# EAGLE board registers (EAGLE 9.5.2)
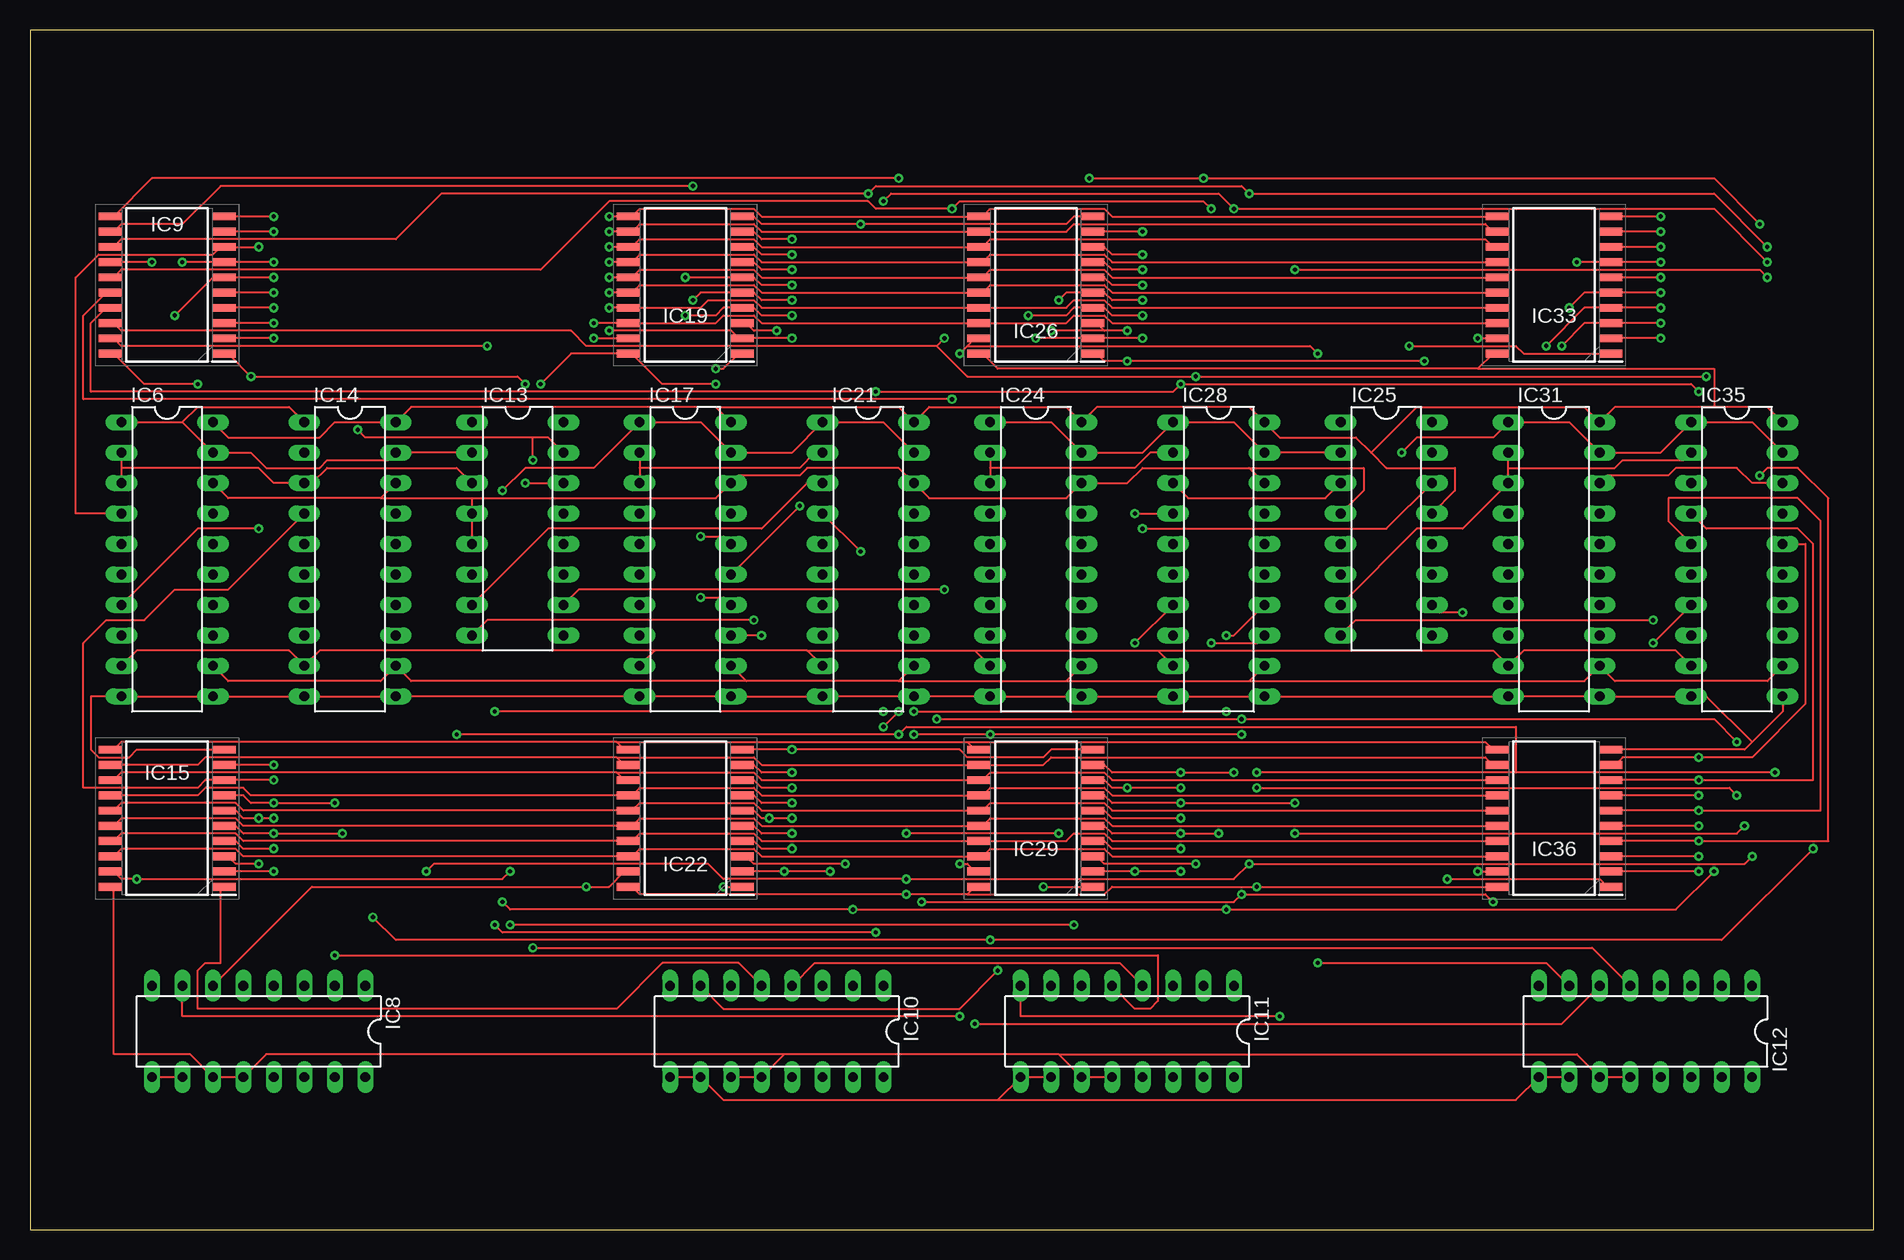
[diagram p0: board, top side]
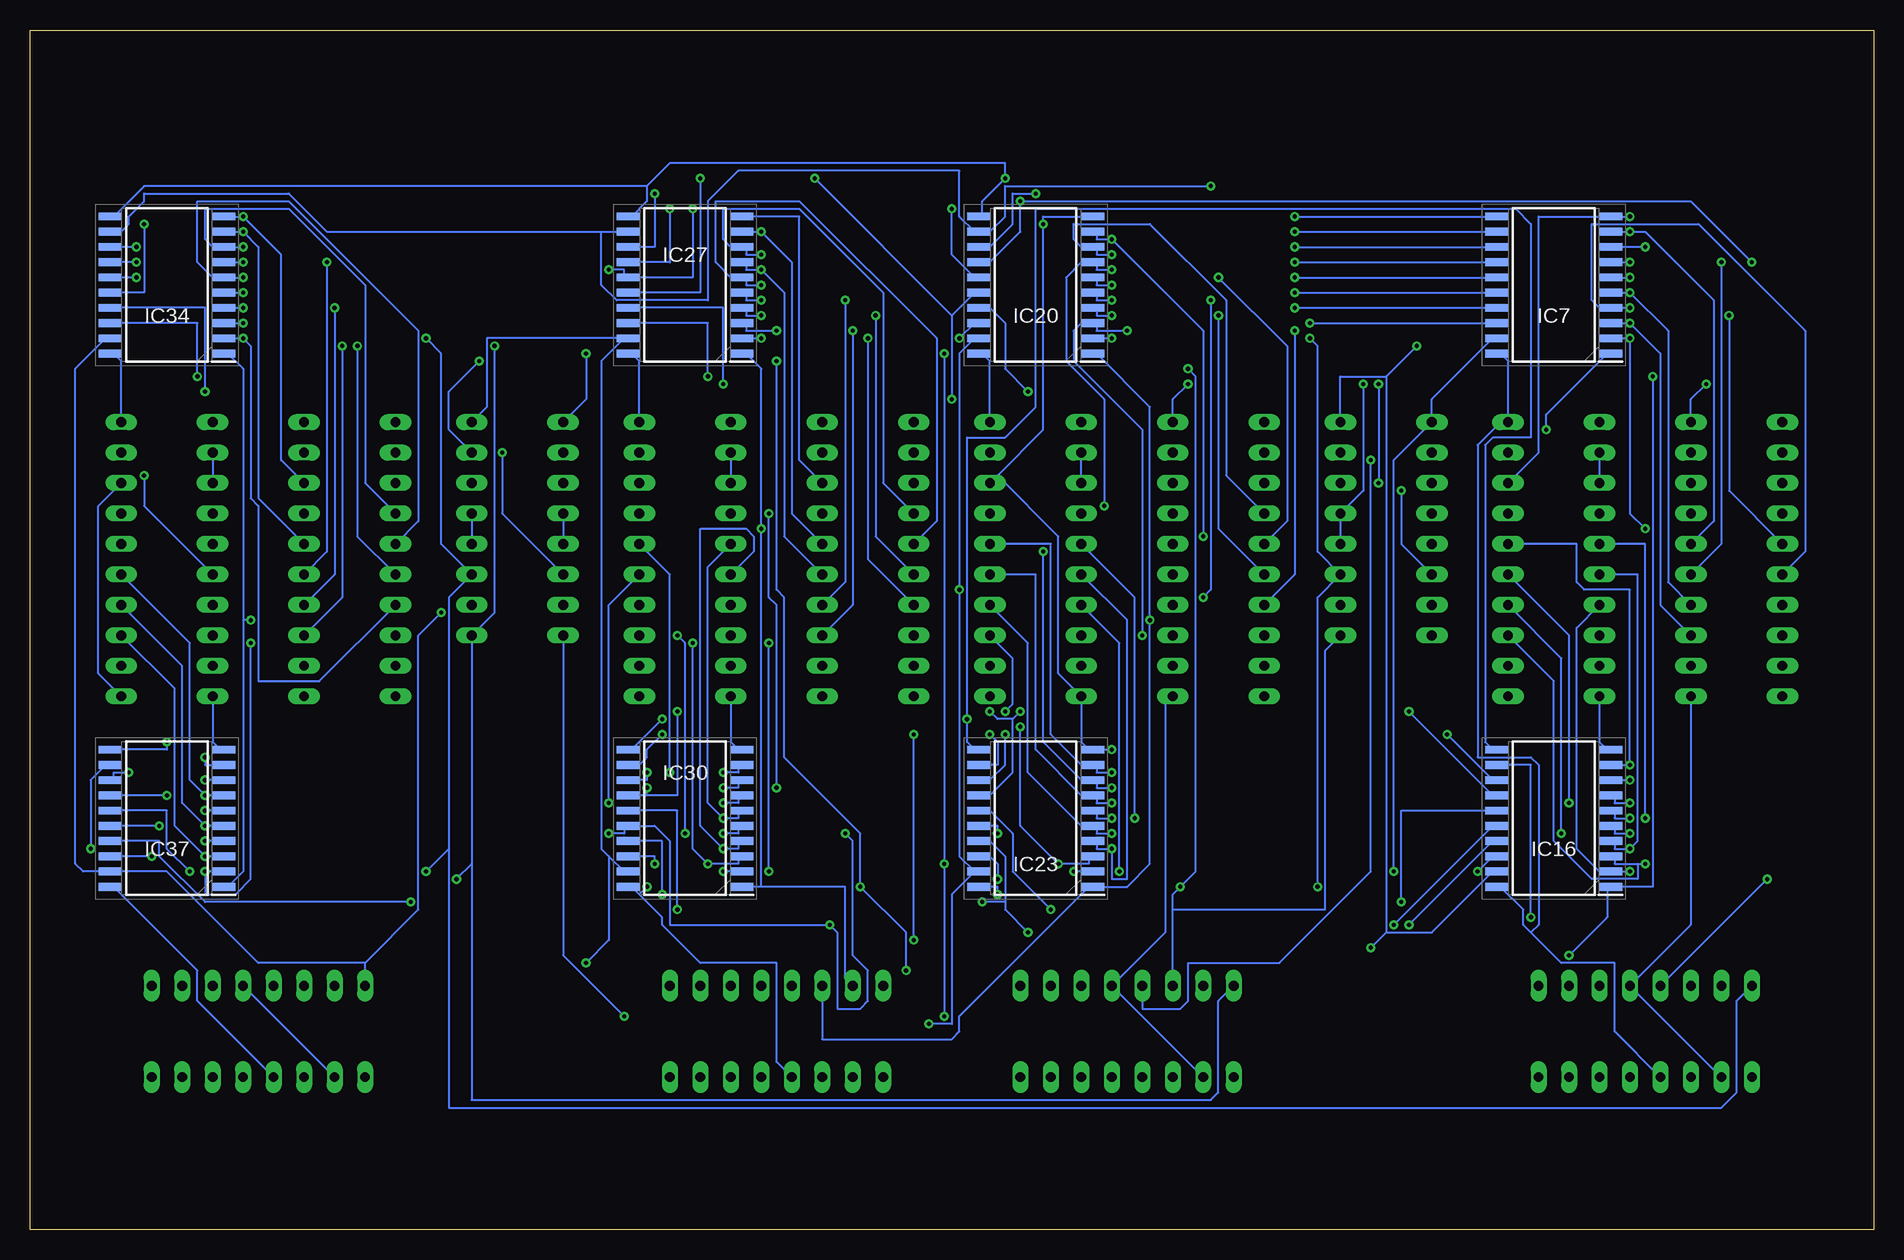
[diagram p1: board, bottom side, seen from below]

Size 153.65 x 100 mm. Coordinates in mm from the lower left corner, seen from the top.
Outline: 0,0 153.65,0 153.65,100 0,100 0,0
Copper layers (1*16): Top 0.035mm / dielectric 1.5mm / Bottom 0.035mm
Design rules "default *": minimum track width 6mil, minimum drill 0.35mm, track to track 6mil, track to pad 6mil, pad to pad 6mil, via to via 6mil, smd to smd 6mil, copper to edge 40mil, drill to drill 6mil, minimum pad ring 10mil, minimum via ring 8mil, stop-mask expansion 4mil, vias tented up to drill 0mil, thermal gap 10mil

## Footprints (pad centres in the part's own frame; a part is rotated, then mirrored left to right if it is on the bottom)
DIL20 = drill 0.813 long: 1 -11.43,-3.81; 2 -8.89,-3.81; 3 -6.35,-3.81; 4 -3.81,-3.81; 5 -1.27,-3.81; 6 1.27,-3.81; 7 3.81,-3.81; 8 6.35,-3.81; 9 8.89,-3.81; 10 11.43,-3.81; 11 11.43,3.81; 12 8.89,3.81; 13 6.35,3.81; 14 3.81,3.81; 15 1.27,3.81; 16 -1.27,3.81; 17 -3.81,3.81; 18 -6.35,3.81; 19 -8.89,3.81; 20 -11.43,3.81
SOIC127P1030X265-20N = smd 1.95 x 0.65: 1 -4.725,5.715; 2 -4.725,4.445; 3 -4.725,3.175; 4 -4.725,1.905; 5 -4.725,0.635; 6 -4.725,-0.635; 7 -4.725,-1.905; 8 -4.725,-3.175; 9 -4.725,-4.445; 10 -4.725,-5.715; 11 4.725,-5.715; 12 4.725,-4.445; 13 4.725,-3.175; 14 4.725,-1.905; 15 4.725,-0.635; 16 4.725,0.635; 17 4.725,1.905; 18 4.725,3.175; 19 4.725,4.445; 20 4.725,5.715
DIL16 = drill 0.813 long: 1 -8.89,-3.81; 2 -6.35,-3.81; 3 -3.81,-3.81; 4 -1.27,-3.81; 5 1.27,-3.81; 6 3.81,-3.81; 7 6.35,-3.81; 8 8.89,-3.81; 9 8.89,3.81; 10 6.35,3.81; 11 3.81,3.81; 12 1.27,3.81; 13 -1.27,3.81; 14 -3.81,3.81; 15 -6.35,3.81; 16 -8.89,3.81

## Placement (x,y rotation side)
IC6  74HCT299N  [DIL20]  11.43,55.88 270 top
IC7  SN74CBT3345DW  [SOIC127P1030X265-20N]  26.67,78.74 180 bottom
IC8  74AC11138  [DIL16]  19.05,16.51 180 top
IC9  SN74CBT3345DW  [SOIC127P1030X265-20N]  11.43,78.74 180 top
IC10  74AC11238  [DIL16]  62.23,16.51 180 top
IC11  74AC11238  [DIL16]  91.44,16.51 180 top
IC12  74AC11138  [DIL16]  134.62,16.51 180 top
IC13  74AC11032  [DIL16]  40.64,58.42 270 top
IC14  74HCT299N  [DIL20]  26.67,55.88 270 top
IC15  SN74CBT3345DW  [SOIC127P1030X265-20N]  11.43,34.29 180 top
IC16  SN74CBT3345DW  [SOIC127P1030X265-20N]  26.67,34.29 180 bottom
IC17  74HCT299N  [DIL20]  54.61,55.88 270 top
IC19  SN74CBT3345DW  [SOIC127P1030X265-20N]  54.61,78.74 180 top
IC20  SN74CBT3345DW  [SOIC127P1030X265-20N]  69.85,78.74 180 bottom
IC21  74HCT299N  [DIL20]  69.85,55.88 270 top
IC22  SN74CBT3345DW  [SOIC127P1030X265-20N]  54.61,34.29 180 top
IC23  SN74CBT3345DW  [SOIC127P1030X265-20N]  69.85,34.29 180 bottom
IC24  74HCT299N  [DIL20]  83.82,55.88 270 top
IC25  74AC11032  [DIL16]  113.03,58.42 270 top
IC26  SN74CBT3345DW  [SOIC127P1030X265-20N]  83.82,78.74 180 top
IC27  SN74CBT3345DW  [SOIC127P1030X265-20N]  99.06,78.74 180 bottom
IC28  74HCT299N  [DIL20]  99.06,55.88 270 top
IC29  SN74CBT3345DW  [SOIC127P1030X265-20N]  83.82,34.29 180 top
IC30  SN74CBT3345DW  [SOIC127P1030X265-20N]  99.06,34.29 180 bottom
IC31  74HCT299N  [DIL20]  127,55.88 270 top
IC33  SN74CBT3345DW  [SOIC127P1030X265-20N]  127,78.74 180 top
IC34  SN74CBT3345DW  [SOIC127P1030X265-20N]  142.24,78.74 180 bottom
IC35  74HCT299N  [DIL20]  142.24,55.88 270 top
IC36  SN74CBT3345DW  [SOIC127P1030X265-20N]  127,34.29 180 top
IC37  SN74CBT3345DW  [SOIC127P1030X265-20N]  142.24,34.29 180 bottom

## Library data of the parts
IC6 IC14 IC17 IC21 IC24 IC28 IC31 IC35 = 74xx-eu
IC7 IC9 IC15 IC16 IC19 IC20 IC22 IC23 IC26 IC27 IC29 IC30 IC33 IC34 IC36 IC37 = SamacSys_Parts; DESCRIPTION: Texas Instruments SN74CBT3345DW, Bus Switch, 8 x 1:1, 4.5 5.5 V, 20-Pin SOIC; HEIGHT: 2.65mm; MANUFACTURER_NAME: Texas Instruments; MANUFACTURER_PART_NUMBER: SN74CBT3345DW
IC8 IC10-IC13 IC25 = 74ac-logic

## Nets
BUSA_BIT0: IC7.18 IC19.18 IC26.18 IC33.18
BUSA_BIT1: IC7.17 IC19.17 IC26.17 IC33.17
BUSA_BIT2: IC7.16 IC19.16 IC26.16 IC33.16
BUSA_BIT3: IC7.15 IC19.15 IC26.15 IC33.15
BUSA_BIT4: IC7.14 IC19.14 IC26.14 IC33.14
BUSA_BIT5: IC7.13 IC19.13 IC26.13 IC33.13
BUSA_BIT6: IC7.12 IC19.12 IC26.12 IC33.12
BUSA_BIT7: IC7.11 IC19.11 IC26.11 IC33.11
BUSA_BIT8: IC15.18 IC22.18 IC29.18 IC36.18
BUSA_BIT9: IC15.17 IC22.17 IC29.17 IC36.17
BUSA_BIT10: IC15.16 IC22.16 IC29.16 IC36.16
BUSA_BIT11: IC15.15 IC22.15 IC29.15 IC36.15
BUSA_BIT12: IC15.14 IC22.14 IC29.14 IC36.14
BUSA_BIT13: IC15.13 IC22.13 IC29.13 IC36.13
BUSA_BIT14: IC15.12 IC22.12 IC29.12 IC36.12
BUSA_BIT15: IC15.11 IC22.11 IC29.11 IC36.11
BUSA_REGIN0: IC8.15
BUSA_REGIN1: IC8.14
BUSA_REGIN2: IC8.13
BUSA_REGOUT0: IC10.15
BUSA_REGOUT1: IC10.14
BUSA_REGOUT2: IC10.13
BUSB_BIT0: IC9.18 IC20.18 IC27.18 IC34.18
BUSB_BIT1: IC9.17 IC20.17 IC27.17 IC34.17
BUSB_BIT2: IC9.16 IC20.16 IC27.16 IC34.16
BUSB_BIT3: IC9.15 IC20.15 IC27.15 IC34.15
BUSB_BIT4: IC9.14 IC20.14 IC27.14 IC34.14
BUSB_BIT5: IC9.13 IC20.13 IC27.13 IC34.13
BUSB_BIT6: IC9.12 IC20.12 IC27.12 IC34.12
BUSB_BIT7: IC9.11 IC20.11 IC27.11 IC34.11
BUSB_BIT8: IC16.18 IC23.18 IC30.18 IC37.18
BUSB_BIT9: IC16.17 IC23.17 IC30.17 IC37.17
BUSB_BIT10: IC16.16 IC23.16 IC30.16 IC37.16
BUSB_BIT11: IC16.15 IC23.15 IC30.15 IC37.15
BUSB_BIT12: IC16.14 IC23.14 IC30.14 IC37.14
BUSB_BIT13: IC16.13 IC23.13 IC30.13 IC37.13
BUSB_BIT14: IC16.12 IC23.12 IC30.12 IC37.12
BUSB_BIT15: IC16.11 IC23.11 IC30.11 IC37.11
BUSB_REGIN0: IC12.15
BUSB_REGIN1: IC12.14
BUSB_REGIN2: IC12.13
BUSB_REGOUT0: IC11.15
BUSB_REGOUT1: IC11.14
BUSB_REGOUT2: IC11.13
CLK: IC6.12 IC14.12 IC17.12 IC21.12 IC24.12 IC28.12 IC31.12 IC35.12
GND: IC6.10 IC6.11 IC6.18 IC7.10 IC8.4 IC8.9 IC8.10 IC9.10 IC10.4 IC10.9 IC10.10 IC11.4 IC11.9 IC11.10 IC12.4 IC12.9 IC12.10 IC13.4 IC13.5 IC14.10 IC14.11 IC14.18 IC15.10 IC16.10 IC17.10 IC17.11 IC17.18 IC19.10 IC20.10 IC21.10 IC21.11 IC21.18 IC22.10 IC23.10 IC24.10 IC24.11 IC24.18 IC25.4 IC25.5 IC26.10 IC27.10 IC28.10 IC28.11 IC28.18 IC29.10 IC30.10 IC31.10 IC31.11 IC31.18 IC33.10 IC34.10 IC35.10 IC35.11 IC35.18 IC36.10 IC37.10
N$8: IC6.7 IC7.2 IC9.2
N$10: IC7.19 IC8.5 IC13.1 IC15.19
N$18: IC6.13 IC7.3 IC9.3
N$19: IC6.2 IC6.3 IC13.3 IC14.2 IC14.3
N$20: IC6.6 IC7.4 IC9.4
N$21: IC6.1 IC6.19 IC13.2 IC14.1 IC14.19
N$22: IC14.7 IC15.2 IC16.2
N$23: IC14.13 IC15.3 IC16.3
N$24: IC14.6 IC15.4 IC16.4
N$25: IC8.7 IC25.1 IC26.19 IC29.19
N$26: IC6.14 IC7.5 IC9.5
N$27: IC6.5 IC7.6 IC9.6
N$28: IC14.14 IC15.5 IC16.5
N$29: IC14.5 IC15.6 IC16.6
N$30: IC14.15 IC15.7 IC16.7
N$31: IC14.4 IC15.8 IC16.8
N$32: IC9.1 IC11.5 IC13.14 IC16.1
N$33: IC9.19 IC12.5 IC13.16 IC16.19
N$34: IC7.1 IC10.5 IC13.15 IC15.1
N$35: IC14.16 IC15.9 IC16.9
N$41: IC6.15 IC7.7 IC9.7
N$43: IC6.4 IC7.8 IC9.8
N$44: IC13.6 IC17.1 IC17.19 IC21.1 IC21.19
N$45: IC17.7 IC19.2 IC20.2
N$46: IC17.13 IC19.3 IC20.3
N$47: IC6.16 IC7.9 IC9.9
N$48: IC17.6 IC19.4 IC20.4
N$49: IC17.14 IC19.5 IC20.5
N$50: IC17.5 IC19.6 IC20.6
N$51: IC17.15 IC19.7 IC20.7
N$52: IC17.4 IC19.8 IC20.8
N$53: IC17.16 IC19.9 IC20.9
N$54: IC13.7 IC17.2 IC17.3 IC21.2 IC21.3
N$56: IC21.7 IC22.2 IC23.2
N$57: IC21.13 IC22.3 IC23.3
N$58: IC21.6 IC22.4 IC23.4
N$59: IC21.14 IC22.5 IC23.5
N$60: IC21.5 IC22.6 IC23.6
N$61: IC21.15 IC22.7 IC23.7
N$62: IC21.4 IC22.8 IC23.8
N$63: IC21.16 IC22.9 IC23.9
N$69: IC24.1 IC24.19 IC25.2 IC28.1 IC28.19
N$70: IC24.7 IC26.2 IC27.2
N$71: IC24.13 IC26.3 IC27.3
N$72: IC24.6 IC26.4 IC27.4
N$73: IC24.14 IC26.5 IC27.5
N$74: IC24.5 IC26.6 IC27.6
N$75: IC24.15 IC26.7 IC27.7
N$76: IC24.4 IC26.8 IC27.8
N$77: IC24.16 IC26.9 IC27.9
N$78: IC24.2 IC24.3 IC25.3 IC28.2 IC28.3
N$80: IC28.7 IC29.2 IC30.2
N$81: IC28.13 IC29.3 IC30.3
N$82: IC28.6 IC29.4 IC30.4
N$83: IC28.14 IC29.5 IC30.5
N$84: IC28.5 IC29.6 IC30.6
N$85: IC28.15 IC29.7 IC30.7
N$86: IC28.4 IC29.8 IC30.8
N$87: IC28.16 IC29.9 IC30.9
N$93: IC25.6 IC31.1 IC31.19 IC35.1 IC35.19
N$94: IC31.7 IC33.2 IC34.2
N$95: IC31.13 IC33.3 IC34.3
N$96: IC31.6 IC33.4 IC34.4
N$97: IC31.14 IC33.5 IC34.5
N$98: IC31.5 IC33.6 IC34.6
N$99: IC31.15 IC33.7 IC34.7
N$100: IC31.4 IC33.8 IC34.8
N$101: IC31.16 IC33.9 IC34.9
N$102: IC25.7 IC31.2 IC31.3 IC35.2 IC35.3
N$104: IC35.7 IC36.2 IC37.2
N$105: IC35.13 IC36.3 IC37.3
N$106: IC35.6 IC36.4 IC37.4
N$107: IC35.14 IC36.5 IC37.5
N$108: IC35.5 IC36.6 IC37.6
N$109: IC35.15 IC36.7 IC37.7
N$110: IC35.4 IC36.8 IC37.8
N$111: IC35.16 IC36.9 IC37.9
N$112: IC8.6 IC13.11 IC19.19 IC22.19
N$113: IC10.6 IC13.9 IC19.1 IC22.1
N$114: IC12.6 IC13.10 IC20.19 IC23.19
N$115: IC11.6 IC13.8 IC20.1 IC23.1
N$117: IC10.7 IC25.15 IC26.1 IC29.1
N$118: IC12.7 IC25.16 IC27.19 IC30.19
N$119: IC11.7 IC25.14 IC27.1 IC30.1
N$120: IC11.8 IC25.8 IC34.1 IC37.1
N$121: IC12.8 IC25.10 IC34.19 IC37.19
N$122: IC8.8 IC25.11 IC33.19 IC36.19
N$123: IC10.8 IC25.9 IC33.1 IC36.1
STARTUP: IC6.9 IC14.9 IC17.9 IC21.9 IC24.9 IC28.9 IC31.9 IC35.9
VCC: IC6.20 IC7.20 IC8.11 IC8.12 IC9.20 IC10.11 IC10.12 IC11.11 IC11.12 IC12.11 IC12.12 IC13.12 IC13.13 IC14.20 IC15.20 IC16.20 IC17.20 IC19.20 IC20.20 IC21.20 IC22.20 IC23.20 IC24.20 IC25.12 IC25.13 IC26.20 IC27.20 IC28.20 IC29.20 IC30.20 IC31.20 IC33.20 IC34.20 IC35.20 IC36.20 IC37.20

## Tracks (layer width: path | path; a pad name or v marks a point on that pad's centre or on a via)
BUSA_BIT0  (via drill 0.35)
  Top 0.152: v46.99,75.56 IC19.18 57.15,75.56 57.78,76.2 60.33,76.2 60.96,75.56 IC26.18 86.36,75.56 87,76.2 89.53,76.2 90.17,75.56 IC33.18
  Bottom 0.152: v46.99,75.56 IC7.18
BUSA_BIT1  (via drill 0.35)
  Top 0.152: v48.26,76.83 IC19.17 55.88,76.83 56.52,77.47 60.33,77.47 60.96,76.83 IC26.17 86.36,76.83 87,77.47 89.53,77.47 90.17,76.83 IC33.17
  Bottom 0.152: v48.26,76.83 IC7.17
BUSA_BIT2  (via drill 0.35)
  Top 0.152: v48.26,78.11 IC19.16 50.16,78.11 50.8,78.74 60.33,78.74 60.96,78.11 IC26.16 79.38,78.11 80.01,78.74 89.53,78.74 90.17,78.11 IC33.16
  Bottom 0.152: v48.26,78.11 IC7.16
BUSA_BIT3  (via drill 0.35)
  Top 0.152: v48.26,79.38 IC19.15 50.16,79.38 50.8,80.01 60.33,80.01 60.96,79.38 IC26.15 79.38,79.38 80.01,80.01 89.53,80.01 90.17,79.38 IC33.15
  Bottom 0.152: v48.26,79.38 IC7.15
BUSA_BIT4  (via drill 0.35)
  Top 0.152: v48.26,80.64 IC19.14 50.16,80.64 50.8,81.28 60.33,81.28 60.96,80.64 IC26.14 79.38,80.64 80.01,81.28 89.53,81.28 90.17,80.64 IC33.14
  Bottom 0.152: v48.26,80.64 IC7.14
BUSA_BIT5  (via drill 0.35)
  Top 0.152: v48.26,81.92 IC19.13 50.16,81.92 50.8,82.55 60.33,82.55 60.96,81.92 IC26.13 79.38,81.92 80.01,82.55 121.28,82.55 121.92,81.92 IC33.13
  Bottom 0.152: v48.26,81.92 IC7.13
BUSA_BIT6  (via drill 0.35)
  Top 0.152: v48.26,83.19 IC19.12 50.16,83.19 50.8,83.82 60.33,83.82 60.96,83.19 IC26.12 86.36,83.19 87,83.82 121.28,83.82 121.92,83.19 IC33.12
  Bottom 0.152: v48.26,83.19 IC7.12
BUSA_BIT7  (via drill 0.35)
  Top 0.152: v48.26,84.45 IC19.11 50.16,84.45 50.8,85.09 60.33,85.09 60.96,84.45 IC26.11 79.38,84.45 80.01,85.09 89.53,85.09 90.17,84.45 IC33.11
  Bottom 0.152: v48.26,84.45 IC7.11
BUSA_BIT8
  Top 0.152: IC15.18 6.99,31.11 7.62,31.75 17.14,31.75 17.78,31.11 IC22.18 50.16,31.11 50.8,31.75 60.33,31.75 60.96,31.11 IC29.18 79.38,31.11 80.01,31.75 89.53,31.75 90.17,31.11 IC36.18
BUSA_BIT9
  Top 0.152: IC15.17 6.99,32.38 7.62,33.02 17.14,33.02 17.78,32.38 IC22.17 50.16,32.38 50.8,33.02 60.33,33.02 60.96,32.38 IC29.17 86.36,32.38 87,33.02 89.53,33.02 90.17,32.38 IC36.17
BUSA_BIT10
  Top 0.152: IC15.16 6.99,33.66 7.62,34.29 17.14,34.29 17.78,33.66 IC22.16 50.16,33.66 50.8,34.29 60.33,34.29 60.96,33.66 IC29.16 79.38,33.66 80.01,34.29 89.53,34.29 90.17,33.66 IC36.16
BUSA_BIT11
  Top 0.152: IC15.15 6.99,34.92 7.62,35.56 17.14,35.56 17.78,34.92 IC22.15 50.16,34.92 50.8,35.56 60.33,35.56 60.96,34.92 IC29.15 79.38,34.92 80.01,35.56 89.53,35.56 90.17,34.92 IC36.15
BUSA_BIT12
  Top 0.152: IC15.14 13.97,36.2 14.61,36.83 17.78,36.83 18.41,36.2 IC22.14 50.16,36.2 50.8,36.83 60.33,36.83 60.96,36.2 IC29.14 79.38,36.2 80.01,36.83 89.53,36.83 90.17,36.2 IC36.14
BUSA_BIT13
  Top 0.152: 48.9,38.1 7.62,38.1 6.99,37.47 IC15.13 | 48.9,38.1 49.53,37.47 IC22.13 | 48.9,38.1 60.33,38.1 60.96,37.47 IC29.13 79.38,37.47 80.01,38.1 89.53,38.1 90.17,37.47 IC36.13
BUSA_BIT14
  Top 0.152: IC15.12 13.97,38.73 14.61,39.37 48.9,39.37 | 48.9,39.37 49.53,38.73 IC22.12 | 48.9,39.37 60.33,39.37 60.96,38.73 IC29.12 84.45,38.73 85.09,39.37 121.28,39.37 121.92,38.73 IC36.12
BUSA_BIT15
  Top 0.152: 48.9,40.64 7.62,40.64 6.99,40.01 IC15.11 | 48.9,40.64 49.53,40.01 IC22.11 | 78.11,40.64 78.74,40.01 IC29.11 | 48.9,40.64 78.11,40.64 | 78.11,40.64 121.28,40.64 121.92,40.01 IC36.11
BUSB_BIT0  (via drill 0.35)
  Top 0.152: 75.56,73.66 46.35,73.66 45.09,74.93 7.62,74.93 6.99,75.56 IC9.18 | v76.2,74.3 75.56,73.66 | 75.56,73.66 78.11,71.12 v97.16,71.12 v139.7,71.12
  Bottom 0.152: v76.2,74.3 74.93,75.56 IC20.18 | IC27.18 97.16,75.56 v97.16,71.12 | IC34.18 139.7,75.56 v139.7,71.12
BUSB_BIT1  (via drill 0.35)
  Top 0.152: IC9.17 6.35,76.83 5.08,75.56 5.08,69.85 v70.48,69.85 95.25,69.85 v95.89,70.48 138.43,70.48 v139.06,69.85
  Bottom 0.152: v70.48,69.85 72.39,71.75 72.39,75.56 73.66,76.83 IC20.17 | IC27.17 95.89,76.83 v95.89,70.48 | IC34.17 139.06,76.83 v139.06,69.85
BUSB_BIT2  (via drill 0.35)
  Top 0.152: v76.83,69.22 4.45,69.22 4.45,76.2 6.35,78.11 IC9.16 | v88.27,87.63 v97.79,87.63 140.34,87.63 v144.15,83.82
  Bottom 0.152: 76.83,76.2 v76.83,69.22 | 76.83,76.2 74.93,78.11 IC20.16 | IC27.16 97.79,78.11 v97.79,87.63 | 76.83,76.2 v88.27,87.63 | IC34.16 144.15,78.11 v144.15,83.82
BUSB_BIT3  (via drill 0.35)
  Top 0.152: IC9.15 6.99,79.38 7.62,80.01 42.55,80.01 48.26,85.72 69.85,85.72 70.48,85.09 v76.83,85.09 77.47,85.72 97.79,85.72 v98.42,85.09 | v144.78,79.38 144.15,80.01 v105.41,80.01
  Bottom 0.152: v76.83,85.09 76.83,81.28 74.93,79.38 IC20.15 | v98.42,85.09 98.42,79.38 IC27.15 104.14,79.38 104.14,80.01 v105.41,80.01 | v144.78,79.38 IC34.15
BUSB_BIT4  (via drill 0.35)
  Top 0.152: v10.16,80.64 IC9.14 | v71.12,85.72 71.75,86.36 99.06,86.36 v100.33,85.09 140.34,85.09 v144.78,80.64
  Bottom 0.152: v10.16,80.64 15.24,85.72 v71.12,85.72 71.12,83.19 73.66,80.64 IC20.14 | IC27.14 100.33,80.64 v100.33,85.09 | v144.78,80.64 IC34.14
BUSB_BIT5  (via drill 0.35)
  Top 0.152: IC9.13 6.99,81.92 7.62,82.55 30.48,82.55 34.29,86.36 v69.85,86.36 70.48,87 100.97,87 v101.6,86.36 140.34,86.36 v144.78,81.92
  Bottom 0.152: v69.85,86.36 71.75,86.36 71.75,83.82 73.66,81.92 IC20.13 | IC27.13 101.6,81.92 v101.6,86.36 | v144.78,81.92 IC34.13
BUSB_BIT6  (via drill 0.35)
  Top 0.152: v55.24,87 15.88,87 12.7,83.82 7.62,83.82 6.99,83.19 IC9.12
  Bottom 0.152: 106.05,83.19 128.91,83.19 132.08,86.36 144.15,86.36 144.15,85.72 145.41,84.45 145.41,83.82 146.05,83.19 IC34.12 | 106.05,83.19 IC27.12 | v55.24,87 72.39,87 72.39,84.45 73.66,83.19 IC20.12 74.93,83.19 76.2,84.45 76.2,88.27 94.61,88.27 97.16,85.72 97.16,77.47 104.78,77.47 106.05,78.74 106.05,83.19
BUSB_BIT7  (via drill 0.35)
  Top 0.152: v72.39,87.63 10.16,87.63 6.99,84.45 IC9.11
  Bottom 0.152: IC20.11 74.3,84.45 74.3,85.72 v72.39,87.63 72.39,88.9 100.33,88.9 102.23,87 | 102.23,87 102.23,85.72 103.5,84.45 IC27.11 | 102.23,87 144.15,87 146.69,84.45 IC34.11
BUSB_BIT8  (via drill 0.35)
  Top 0.152: v33.02,29.84 33.66,30.48 56.52,30.48 57.78,29.21 v73.03,29.21 100.33,29.21 v101.6,30.48 142.88,30.48 v143.51,31.11
  Bottom 0.152: v33.02,29.84 31.75,31.11 IC16.18 | v73.03,29.21 73.03,30.48 73.66,31.11 IC23.18 | IC30.18 101.6,31.11 v101.6,30.48 | v143.51,31.11 IC37.18
BUSB_BIT9  (via drill 0.35)
  Top 0.152: v38.73,25.4 39.37,24.77 v70.48,24.77 | v74.3,27.3 100.33,27.3 v100.97,27.94 121.28,27.94 v121.92,27.3
  Bottom 0.152: v38.73,25.4 31.75,32.38 IC16.17 | v70.48,24.77 72.39,26.67 72.39,27.3 | 72.39,27.3 72.39,31.11 73.66,32.38 IC23.17 | IC30.17 100.97,32.38 v100.97,27.94 | 72.39,27.3 v74.3,27.3 | IC37.17 142.88,32.38 142.88,31.11 139.06,27.3 v121.92,27.3
BUSB_BIT10  (via drill 0.35)
  Top 0.152: v87,25.4 v40.01,25.4 | v85.72,33.02 v73.03,33.02 | v142.88,33.66 142.24,33.02 v105.41,33.02
  Bottom 0.152: v40.01,25.4 31.75,33.66 IC16.16 | IC23.16 73.03,33.66 v73.03,33.02 | v85.72,33.02 85.09,32.38 85.09,22.86 83.82,21.59 83.82,19.05 84.45,18.41 86.36,18.41 86.36,24.77 v87,25.4 100.33,25.4 100.33,32.38 101.6,33.66 IC30.16 104.14,33.66 104.14,33.02 v105.41,33.02 | v142.88,33.66 IC37.16
BUSB_BIT11  (via drill 0.35)
  Top 0.152: v39.37,27.3 40.01,26.67 v68.58,26.67 v99.69,26.67 137.16,26.67 v140.34,29.84
  Bottom 0.152: IC16.15 39.37,34.92 v39.37,27.3 | v68.58,26.67 71.75,29.84 71.75,33.02 73.66,34.92 IC23.15 | IC30.15 99.69,34.92 v99.69,26.67 | IC37.15 142.24,34.92 142.24,31.75 v140.34,29.84
BUSB_BIT12  (via drill 0.35)
  Top 0.152: v71.12,43.18 v38.73,43.18 | v73.66,43.18 v99.69,43.18 | v142.24,36.2 141.6,36.83 v102.23,36.83
  Bottom 0.152: v38.73,43.18 31.75,36.2 IC16.14 | 71.75,42.55 v71.12,43.18 | 71.75,42.55 71.75,38.1 73.66,36.2 IC23.14 | 102.23,36.2 99.69,36.2 v99.69,43.18 | 102.23,36.2 IC30.14 | v73.66,43.18 73.03,42.55 71.75,42.55 | v142.24,36.2 IC37.14 | 102.23,36.2 v102.23,36.83
BUSB_BIT13  (via drill 0.35)
  Top 0.152: v145.41,38.1 123.83,38.1 | 123.83,38.1 v102.23,38.1 | v35.56,41.27 v72.39,41.27 73.03,41.91 123.83,41.91 123.83,38.1
  Bottom 0.152: IC30.13 102.23,37.47 v102.23,38.1 | v145.41,38.1 146.69,38.1 146.69,37.47 IC37.13 | v35.56,41.27 31.75,37.47 IC16.13 | v72.39,41.27 72.39,38.73 73.66,37.47 IC23.13
BUSB_BIT14  (via drill 0.35)
  Top 0.152: v100.97,41.27 v80.01,41.27 v73.66,41.27 | v28.57,26.04 30.48,24.13 v80.01,24.13 140.97,24.13 v148.59,31.75
  Bottom 0.152: IC23.12 73.03,38.73 73.03,40.64 v73.66,41.27 | v100.97,41.27 102.23,40.01 102.23,39.37 102.87,38.73 IC30.12 | IC16.12 28.57,38.73 v28.57,26.04 | v148.59,31.75 148.59,37.47 147.32,38.73 IC37.12 | v80.01,24.13 v80.01,41.27
BUSB_BIT15  (via drill 0.35)
  Top 0.152: v75.56,42.55 v100.97,42.55 140.34,42.55 v142.24,40.64
  Bottom 0.152: IC16.11 31.75,40.01 32.38,40.64 32.38,65.41 31.75,66.04 28.57,66.04 28.57,83.82 29.84,85.09 69.85,85.09 69.85,68.58 72.39,66.04 75.56,66.04 v75.56,42.55 75.56,40.64 74.93,40.01 IC23.11 | v100.97,42.55 103.5,40.01 IC30.11 | IC37.11 142.24,40.01 v142.24,40.64
CLK
  Top 0.152: IC35.12 144.78,45.72 132.08,45.72 IC31.12 129.54,45.72 101.6,45.72 | IC6.12 16.51,45.72 29.21,45.72 IC14.12 31.75,45.72 59.69,45.72 | 59.69,45.72 IC17.12 | 72.39,45.72 59.69,45.72 | IC21.12 72.39,45.72 | 86.36,45.72 IC24.12 | 72.39,45.72 86.36,45.72 | 101.6,45.72 IC28.12 | 86.36,45.72 101.6,45.72
GND  (via drill 0.35)
  Top 0.152: v20.32,84.45 IC9.10 | IC13.5 IC13.4 36.83,60.96 | IC6.18 16.51,60.96 29.21,60.96 | IC14.18 29.21,60.96 | 29.21,60.96 36.83,60.96 | 36.83,60.96 57.15,60.96 IC17.18 59.05,62.87 64.14,62.87 64.77,63.5 72.39,63.5 IC21.18 74.93,60.96 86.36,60.96 IC24.18 91.44,62.23 92.71,63.5 101.6,63.5 | 101.6,63.5 IC28.18 | IC25.4 111.12,61.59 111.12,63.5 101.6,63.5 | IC19.10 60.33,84.45 60.96,83.82 v69.22,83.82 86.36,83.82 87,84.45 IC26.10 | IC12.10 IC12.9 123.83,10.79 80.64,10.79 | IC11.10 IC11.9 80.64,10.79 | IC10.9 IC10.10 57.78,10.79 80.64,10.79 | IC11.4 90.81,22.23 65.41,22.23 IC10.4 | IC8.10 IC8.9 | IC15.10 8.89,40.01 8.26,39.37 5.71,39.37 5.08,40.01 5.08,44.45 IC6.10 IC6.11 IC14.10 IC14.11 IC17.10 IC17.11 IC21.10 IC21.11 IC24.10 IC24.11 IC28.10 IC28.11 IC31.10 IC31.11 IC35.10 139.7,44.45 143.51,40.64 | v135.89,84.45 IC33.10 | IC31.18 131.44,62.87 136.53,62.87 137.16,63.5 142.24,63.5 143.51,62.23 IC35.18 | IC22.10 v63.5,40.01 77.47,40.01 78.11,39.37 84.45,39.37 85.09,40.01 IC29.10 | IC36.10 142.88,40.01 143.51,40.64 | 143.51,40.64 146.05,43.18 IC35.11
  Bottom 0.152: v20.32,84.45 IC7.10 27.94,84.45 27.94,64.77 IC14.18 | IC25.4 IC25.5 | IC27.10 89.53,84.45 89.53,64.14 IC24.18 | IC20.10 69.22,84.45 v69.22,83.82 69.22,66.67 73.03,62.87 | IC12.10 IC12.4 | IC10.10 IC10.4 59.05,24.77 59.05,43.81 IC17.11 | IC8.10 IC8.4 15.24,25.4 IC6.11 | IC14.10 22.86,40.64 22.23,40.01 IC16.10 | IC34.10 v135.89,84.45 132.72,81.28 132.72,64.14 IC31.18 | IC35.10 138.43,40.64 137.79,40.01 IC37.10 | IC28.10 95.25,40.64 94.61,40.01 IC30.10 | v63.5,40.01 IC23.10 65.41,40.01 66.04,40.64 IC21.10 67.94,46.35 67.94,57.78 73.03,62.87 | IC35.18 147.96,60.33 147.96,46.35 IC35.11 | 73.03,62.87 IC21.18
N$8  (via drill 0.35)
  Top 0.152: v20.32,74.3 IC9.2 | IC6.7 13.97,58.42 v19.05,58.42
  Bottom 0.152: IC7.2 v20.32,74.3 20.32,59.69 v19.05,58.42
N$10  (via drill 0.35)
  Top 0.152: IC15.19 6.99,29.84 7.62,29.21 v8.89,29.21 39.37,29.21 v40.01,29.84
  Bottom 0.152: IC7.19 31.75,74.3 36.83,69.22 IC13.1 40.01,64.14 v40.01,29.84 | IC8.5 v8.89,29.21
N$18  (via drill 0.35)
  Top 0.152: v20.32,75.56 IC9.3
  Bottom 0.152: IC7.3 v20.32,75.56 17.78,73.03 17.78,52.07 IC6.13
N$19
  Top 0.152: IC6.2 7.62,63.5 | 7.62,63.5 IC6.3 | IC13.3 35.56,63.5 24.77,63.5 23.5,62.23 IC14.3 20.32,62.23 19.05,63.5 7.62,63.5
  Bottom 0.152: IC14.2 IC14.3
N$20  (via drill 0.35)
  Top 0.152: v20.32,76.83 IC9.4
  Bottom 0.152: v20.32,76.83 IC7.4 22.86,76.83 23.5,77.47 23.5,83.82 14.61,83.82 5.71,74.93 5.71,56.52 IC6.6
N$21
  Top 0.152: IC13.2 IC14.19 29.84,64.14 24.77,64.14 24.13,63.5 19.68,63.5 18.41,64.77 IC6.19 12.7,67.31 | IC6.1 12.7,67.31 | IC14.1 21.59,68.58 13.97,68.58 12.7,67.31
N$22  (via drill 0.35)
  Top 0.152: v20.32,29.84 IC15.2
  Bottom 0.152: v20.32,29.84 IC16.2 22.86,29.84 24.77,31.75 24.77,50.16 IC14.7
N$23  (via drill 0.35)
  Top 0.152: v19.05,30.48 17.14,30.48 16.51,31.11 IC15.3
  Bottom 0.152: 19.68,30.48 21.59,30.48 21.59,31.11 IC16.3 | 19.68,30.48 v19.05,30.48 | IC14.13 26.67,45.72 26.67,32.38 23.5,29.21 19.68,29.21 19.68,30.48
N$24  (via drill 0.35)
  Top 0.152: IC15.4 17.14,32.38 17.78,31.75 v20.32,31.75
  Bottom 0.152: IC16.4 21.59,32.38 21.59,31.75 v20.32,31.75 19.68,32.38 19.68,54.61 IC14.6
N$25  (via drill 0.35)
  Top 0.152: v77.47,30.48 78.11,30.48 78.74,29.84 IC29.19 | 78.11,73.66 78.74,74.3 IC26.19 | 78.11,73.66 v77.47,73.03 | IC8.7 12.7,17.78 v77.47,17.78 | v107.31,73.03 106.68,73.66 78.11,73.66
  Bottom 0.152: v77.47,73.03 v77.47,30.48 v77.47,17.78 | IC25.1 107.31,69.22 v107.31,73.03
N$26  (via drill 0.35)
  Top 0.152: v20.32,78.11 IC9.5
  Bottom 0.152: IC7.5 v20.32,78.11 17.14,74.93 17.14,53.98 IC6.14
N$27  (via drill 0.35)
  Top 0.152: v20.32,79.38 IC9.6 15.24,79.38 v12.06,76.2
  Bottom 0.152: IC7.6 v20.32,79.38 | IC6.5 12.06,61.59 v12.06,76.2
N$28  (via drill 0.35)
  Top 0.152: IC15.5 17.14,33.66 17.78,33.02 v20.32,33.02 v26.04,33.02
  Bottom 0.152: v20.32,33.02 21.59,33.02 21.59,33.66 IC16.5 | IC14.14 26.04,47.62 v26.04,33.02
N$29  (via drill 0.35)
  Top 0.152: IC15.6 17.14,34.92 17.78,34.29 v19.05,34.29 v20.32,34.29
  Bottom 0.152: v20.32,34.29 21.59,34.29 21.59,34.92 IC16.6 | IC14.5 19.05,57.15 v19.05,34.29
N$30  (via drill 0.35)
  Top 0.152: IC15.7 17.78,36.2 18.41,35.56 v20.32,35.56 v25.4,35.56
  Bottom 0.152: v20.32,35.56 21.59,35.56 21.59,36.2 IC16.7 | IC14.15 25.4,49.53 v25.4,35.56
N$31  (via drill 0.35)
  Top 0.152: v20.32,37.47 IC15.8 14.61,37.47 13.97,36.83 4.45,36.83 4.45,48.9 6.35,50.8 9.53,50.8 12.06,53.34 16.51,53.34 IC14.4
  Bottom 0.152: IC16.8 v20.32,37.47
N$32  (via drill 0.35)
  Top 0.152: IC9.1 16.51,73.03 v18.41,71.12 40.64,71.12 v41.27,70.48 | v41.27,62.23 IC13.14 | IC11.5 92.08,18.41 93.34,18.41 93.98,19.05 93.98,22.86 v25.4,22.86
  Bottom 0.152: v18.41,71.12 18.41,28.57 IC16.1 22.23,28.57 22.23,26.04 v25.4,22.86 | v41.27,70.48 v41.27,62.23
N$33  (via drill 0.35)
  Top 0.152: v38.1,73.66 7.62,73.66 6.99,74.3 IC9.19 | IC12.5 130.18,23.5 v41.91,23.5
  Bottom 0.152: 40.64,24.77 36.83,24.77 31.75,29.84 IC16.19 | 40.64,71.12 40.64,24.77 | 40.64,71.12 44.45,71.12 IC13.16 | 40.64,71.12 v38.1,73.66 | 40.64,24.77 v41.91,23.5
N$34  (via drill 0.35)
  Top 0.152: v27.3,66.67 27.94,66.04 41.91,66.04 | 41.91,66.04 43.18,66.04 IC13.15 | IC10.5 59.05,22.23 52.7,22.23 48.9,18.41 13.97,18.41 13.97,21.59 14.61,22.23 15.88,22.23 15.88,28.57 IC15.1 | v41.91,64.14 41.91,66.04
  Bottom 0.152: v27.3,66.67 27.3,67.94 22.23,73.03 IC7.1 | v41.91,64.14 41.91,29.84 49.53,22.23 57.15,22.23 57.15,19.05 57.78,18.41 60.96,18.41 IC10.5
N$35  (via drill 0.35)
  Top 0.152: v20.32,38.73 IC15.9
  Bottom 0.152: IC16.9 v20.32,38.73 20.32,53.34 24.13,53.34 24.77,53.98 24.77,57.15 IC14.16
N$41  (via drill 0.35)
  Top 0.152: v20.32,80.64 IC9.7 v12.7,80.64
  Bottom 0.152: IC7.7 v20.32,80.64 | IC6.15 12.7,57.15 v12.7,80.64
N$43  (via drill 0.35)
  Top 0.152: IC6.4 3.81,59.69 3.81,79.38 5.71,81.28 15.24,81.28 15.88,81.92 IC9.8 v19.05,81.92
  Bottom 0.152: v19.05,81.92 IC7.8
N$44  (via drill 0.35)
  Top 0.152: v39.37,61.59 41.27,63.5 46.99,63.5 IC17.1 55.88,67.31 IC17.19 63.5,64.77 IC21.1 71.12,67.31 IC21.19
  Bottom 0.152: IC13.6 39.37,57.15 v39.37,61.59
N$45  (via drill 0.35)
  Top 0.152: v63.5,74.3 IC19.2 59.05,74.3 58.42,74.93 v48.26,74.93
  Bottom 0.152: IC20.2 v63.5,74.3 | IC17.7 48.26,54.61 v48.26,74.93
N$46  (via drill 0.35)
  Top 0.152: v62.23,74.93 60.33,74.93 59.69,75.56 IC19.3 | v60.96,49.53 IC17.13
  Bottom 0.152: v62.23,74.93 64.77,74.93 64.77,75.56 IC20.3 66.04,75.56 66.67,74.93 66.67,72.39 60.96,66.67 v60.96,49.53
N$47  (via drill 0.35)
  Top 0.152: v20.32,83.19 IC9.9
  Bottom 0.152: IC7.9 v20.32,83.19 19.05,83.19 13.34,77.47 13.34,59.05 IC6.16
N$48  (via drill 0.35)
  Top 0.152: v63.5,76.2 60.96,76.2 60.33,76.83 IC19.4 57.78,76.83 57.15,76.2 v54.61,76.2
  Bottom 0.152: v63.5,76.2 64.77,76.2 64.77,76.83 IC20.4 | IC17.6 54.61,58.42 v54.61,76.2
N$49  (via drill 0.35)
  Top 0.152: v63.5,77.47 60.96,77.47 60.33,78.11 IC19.5 55.88,78.11 v55.24,77.47 | IC17.14 57.78,52.7 v55.88,52.7
  Bottom 0.152: v63.5,77.47 64.77,77.47 64.77,78.11 IC20.5 | v55.88,52.7 55.24,53.34 v55.24,77.47
N$50  (via drill 0.35)
  Top 0.152: v63.5,78.74 60.96,78.74 60.33,79.38 IC19.6 v54.61,79.38
  Bottom 0.152: v63.5,78.74 64.77,78.74 64.77,79.38 IC20.6 | IC17.5 48.9,59.05 48.9,73.66 v54.61,79.38
N$51  (via drill 0.35)
  Top 0.152: IC19.7 60.33,80.64 60.96,80.01 v63.5,80.01 | v64.14,60.33 IC17.15
  Bottom 0.152: v63.5,80.01 64.77,80.01 64.77,80.64 IC20.7 66.04,80.64 67.31,79.38 67.31,72.39 64.14,69.22 v64.14,60.33
N$52  (via drill 0.35)
  Top 0.152: IC19.8 60.33,81.92 60.96,81.28 v63.5,81.28
  Bottom 0.152: v63.5,81.28 64.77,81.28 64.77,81.92 IC20.8 66.04,81.92 66.67,82.55 66.67,83.82 60.33,83.82 53.98,77.47 53.98,62.87 IC17.4
N$53  (via drill 0.35)
  Top 0.152: IC19.9 60.33,83.19 60.96,82.55 v63.5,82.55 | IC17.16 57.78,57.78 v55.88,57.78
  Bottom 0.152: IC20.9 64.77,83.19 64.77,82.55 v63.5,82.55 55.88,74.93 v55.88,57.78
N$54
  Top 0.152: IC17.2 50.8,63.5 | 50.8,63.5 IC17.3 | IC13.7 43.18,58.42 60.96,58.42 64.77,62.23 IC21.3 | 50.8,63.5 64.14,63.5 65.41,64.77 IC21.2
  Bottom 0.152: IC21.3 IC21.2
N$56  (via drill 0.35)
  Top 0.152: v66.67,29.84 v62.87,29.84 IC22.2
  Bottom 0.152: IC23.2 v66.67,29.84 | IC21.7 62.87,48.9 v62.87,29.84
N$57  (via drill 0.35)
  Top 0.152: v67.94,30.48 60.33,30.48 59.69,31.11 IC22.3 | v71.12,41.91 v72.39,43.18
  Bottom 0.152: IC23.3 65.41,31.11 65.41,30.48 v67.94,30.48 71.12,33.66 v71.12,41.91 | IC21.13 71.75,47.62 71.75,43.81 v72.39,43.18
N$58  (via drill 0.35)
  Top 0.152: IC22.4 60.33,32.38 60.96,31.75 v63.5,31.75
  Bottom 0.152: IC23.4 64.77,32.38 64.77,31.75 v63.5,31.75 63.5,29.21 62.23,29.21 62.23,50.8 IC21.6
N$59  (via drill 0.35)
  Top 0.152: IC22.5 60.33,33.66 60.96,33.02 v63.5,33.02
  Bottom 0.152: v63.5,33.02 64.77,33.02 64.77,33.66 IC23.5 66.04,33.66 70.48,38.1 70.48,48.9 IC21.14
N$60  (via drill 0.35)
  Top 0.152: IC22.6 60.33,34.92 60.96,34.29 v61.59,34.29 v63.5,34.29
  Bottom 0.152: v63.5,34.29 64.77,34.29 64.77,34.92 IC23.6 | IC21.5 61.59,52.7 v61.59,34.29
N$61  (via drill 0.35)
  Top 0.152: IC22.7 60.33,36.2 60.96,35.56 v63.5,35.56
  Bottom 0.152: v63.5,35.56 64.77,35.56 64.77,36.2 IC23.7 66.04,36.2 69.85,40.01 69.85,54.61 IC21.15
N$62  (via drill 0.35)
  Top 0.152: IC22.8 60.33,37.47 60.96,36.83 v63.5,36.83 | v69.22,56.52 IC21.4
  Bottom 0.152: v63.5,36.83 64.77,36.83 64.77,37.47 IC23.8 66.04,37.47 69.22,40.64 v69.22,56.52
N$63  (via drill 0.35)
  Top 0.152: IC22.9 60.33,38.73 60.96,38.1 v63.5,38.1
  Bottom 0.152: v63.5,38.1 64.77,38.1 64.77,38.73 IC23.9 66.04,38.73 68.58,41.27 68.58,57.15 IC21.16
N$69
  Top 0.152: IC25.2 IC28.19 100.33,67.31 IC28.1 92.71,64.77 IC24.19 85.09,67.31 IC24.1
N$70  (via drill 0.35)
  Top 0.152: v92.71,74.3 IC26.2 v83.82,74.3
  Bottom 0.152: IC27.2 v92.71,74.3 | IC24.7 83.82,55.88 v83.82,74.3
N$71  (via drill 0.35)
  Top 0.152: 89.53,74.93 88.9,75.56 IC26.3 | v91.44,74.93 89.53,74.93 | 89.53,74.93 v85.09,74.93
  Bottom 0.152: v91.44,74.93 93.98,74.93 93.98,75.56 IC27.3 | IC24.13 85.09,52.07 v85.09,74.93
N$72  (via drill 0.35)
  Top 0.152: v92.71,76.2 90.17,76.2 89.53,76.83 IC26.4 87,76.83 86.36,76.2 v83.19,76.2
  Bottom 0.152: v92.71,76.2 93.98,76.2 93.98,76.83 IC27.4 | IC24.6 83.19,57.78 v83.19,76.2
N$73  (via drill 0.35)
  Top 0.152: v92.71,77.47 90.17,77.47 89.53,78.11 IC26.5 86.36,78.11 v85.72,77.47
  Bottom 0.152: v92.71,77.47 93.98,77.47 93.98,78.11 IC27.5 | IC24.14 85.72,53.98 v85.72,77.47
N$74  (via drill 0.35)
  Top 0.152: IC26.6 89.53,79.38 90.17,78.74 v92.71,78.74
  Bottom 0.152: v92.71,78.74 93.98,78.74 93.98,79.38 IC27.6 95.25,79.38 96.52,80.64 96.52,85.72 89.53,85.72 78.11,74.3 78.11,59.05 IC24.5
N$75  (via drill 0.35)
  Top 0.152: IC26.7 89.53,80.64 90.17,80.01 v92.71,80.01
  Bottom 0.152: IC27.7 93.98,80.64 93.98,80.01 v92.71,80.01 90.81,78.11 90.81,57.78 IC24.15
N$76  (via drill 0.35)
  Top 0.152: IC26.8 89.53,81.92 90.17,81.28 v92.71,81.28
  Bottom 0.152: v92.71,81.28 93.98,81.28 93.98,81.92 IC27.8 95.25,81.92 95.89,82.55 95.89,85.09 89.53,85.09 82.55,78.11 82.55,62.23 IC24.4
N$77  (via drill 0.35)
  Top 0.152: v92.71,83.19 IC26.9
  Bottom 0.152: IC27.9 v92.71,83.19 90.17,80.64 90.17,59.69 IC24.16
N$78
  Top 0.152: IC24.2 80.01,63.5 | 80.01,63.5 IC24.3 | IC25.3 107.95,60.96 96.52,60.96 IC28.3 | 80.01,63.5 92.08,63.5 93.34,64.77 IC28.2
  Bottom 0.152: IC28.2 IC28.3
N$80  (via drill 0.35)
  Top 0.152: v95.89,29.84 v92.08,29.84 IC29.2 | v92.08,48.9 IC28.7
  Bottom 0.152: IC30.2 v95.89,29.84 | v92.08,29.84 v92.08,48.9
N$81  (via drill 0.35)
  Top 0.152: v97.16,30.48 89.53,30.48 88.9,31.11 IC29.3 | IC28.13 102.23,48.9 v98.42,48.9
  Bottom 0.152: IC30.3 94.61,31.11 94.61,30.48 v97.16,30.48 98.42,31.75 v98.42,48.9
N$82  (via drill 0.35)
  Top 0.152: IC29.4 89.53,32.38 90.17,31.75 v95.89,31.75
  Bottom 0.152: IC30.4 94.61,32.38 94.61,31.75 v95.89,31.75 97.79,33.66 97.79,58.42 93.98,58.42 93.34,57.78 93.34,56.52 IC28.6
N$83  (via drill 0.35)
  Top 0.152: IC29.5 89.53,33.66 90.17,33.02 v95.89,33.02 v99.06,33.02 | IC28.14 100.33,49.53 v99.69,49.53
  Bottom 0.152: v95.89,33.02 94.61,33.02 94.61,33.66 IC30.5 | v99.69,49.53 99.06,48.9 v99.06,33.02
N$84  (via drill 0.35)
  Top 0.152: IC29.6 89.53,34.92 90.17,34.29 v95.89,34.29
  Bottom 0.152: IC30.6 94.61,34.92 94.61,34.29 v95.89,34.29 97.16,35.56 97.16,55.24 IC28.5
N$85  (via drill 0.35)
  Top 0.152: IC29.7 89.53,36.2 90.17,35.56 v95.89,35.56 v105.41,35.56
  Bottom 0.152: v95.89,35.56 94.61,35.56 94.61,36.2 IC30.7 | IC28.15 105.41,52.07 v105.41,35.56
N$86  (via drill 0.35)
  Top 0.152: IC29.8 89.53,37.47 90.17,36.83 v91.44,36.83 v95.89,36.83 | v92.08,59.69 IC28.4
  Bottom 0.152: v95.89,36.83 94.61,36.83 94.61,37.47 IC30.8 | v92.08,59.69 92.08,52.7 91.44,52.07 v91.44,36.83
N$87  (via drill 0.35)
  Top 0.152: IC29.9 89.53,38.73 90.17,38.1 v95.89,38.1 v100.33,38.1
  Bottom 0.152: v95.89,38.1 94.61,38.1 94.61,38.73 IC30.9 | IC28.16 100.33,54.61 v100.33,38.1
N$93  (via drill 0.35)
  Top 0.152: v114.3,64.77 115.57,66.04 121.92,66.04 IC31.1 128.27,67.31 IC31.19 135.89,64.77 IC35.1 143.51,67.31 IC35.19
  Bottom 0.152: IC25.6 114.3,59.69 v114.3,64.77
N$94  (via drill 0.35)
  Top 0.152: v135.89,74.3 IC33.2
  Bottom 0.152: IC34.2 v135.89,74.3 135.25,73.66 135.25,60.96 134.62,60.33 134.62,45.72 129.54,45.72 IC31.7
N$95  (via drill 0.35)
  Top 0.152: v135.89,75.56 IC33.3 129.54,75.56 v127.64,73.66
  Bottom 0.152: IC34.3 v135.89,75.56 | IC31.13 127.64,52.7 v127.64,73.66
N$96  (via drill 0.35)
  Top 0.152: v135.89,76.83 IC33.4 129.54,76.83 v126.36,73.66
  Bottom 0.152: IC34.4 v135.89,76.83 | IC31.6 126.36,57.78 v126.36,73.66
N$97  (via drill 0.35)
  Top 0.152: v135.89,78.11 IC33.5 129.54,78.11 v128.27,76.83
  Bottom 0.152: IC34.5 v135.89,78.11 | IC31.14 128.27,54.61 v128.27,76.83
N$98  (via drill 0.35)
  Top 0.152: v135.89,79.38 IC33.6
  Bottom 0.152: v135.89,79.38 IC34.6 138.43,79.38 139.7,80.64 139.7,85.72 132.08,85.72 121.28,74.93 121.28,59.05 IC31.5
N$99  (via drill 0.35)
  Top 0.152: v135.89,80.64 IC33.7 v128.91,80.64
  Bottom 0.152: IC34.7 v135.89,80.64 | IC31.15 128.91,56.52 v128.91,80.64
N$100  (via drill 0.35)
  Top 0.152: v135.89,81.92 IC33.8
  Bottom 0.152: v135.89,81.92 IC34.8 138.43,81.92 139.06,82.55 139.06,85.09 132.08,85.09 125.73,78.74 125.73,62.23 IC31.4
N$101  (via drill 0.35)
  Top 0.152: v135.89,83.19 IC33.9
  Bottom 0.152: IC34.9 v135.89,83.19 134.62,81.92 134.62,60.96 IC31.16
N$102
  Top 0.152: IC25.7 115.57,58.42 119.38,58.42 IC31.3 123.19,63.5 | 123.19,63.5 IC31.2 | IC35.2 137.79,64.14 132.72,64.14 132.08,63.5 123.19,63.5
  Bottom 0.152: IC35.2 IC35.3
N$104  (via drill 0.35)
  Top 0.152: v139.06,29.84 IC36.2 | v135.25,48.9 IC35.7
  Bottom 0.152: IC37.2 v139.06,29.84 139.06,27.94 136.53,27.94 135.25,29.21 v135.25,48.9
N$105  (via drill 0.35)
  Top 0.152: v139.06,31.11 IC36.3
  Bottom 0.152: IC37.3 v139.06,31.11 141.6,33.66 141.6,45.09 IC35.13
N$106  (via drill 0.35)
  Top 0.152: IC36.4 v139.06,32.38 149.86,32.38 149.86,60.96 147.32,63.5 144.78,63.5 v144.15,62.87
  Bottom 0.152: IC37.4 v139.06,32.38 | IC35.6 144.15,60.33 v144.15,62.87
N$107  (via drill 0.35)
  Top 0.152: v139.06,33.66 IC36.5
  Bottom 0.152: IC37.5 v139.06,33.66 140.97,35.56 140.97,46.99 IC35.14
N$108  (via drill 0.35)
  Top 0.152: IC36.6 v139.06,34.92 149.22,34.92 149.22,59.05 147.32,60.96 136.53,60.96 136.53,59.05 IC35.5
  Bottom 0.152: IC37.6 v139.06,34.92
N$109  (via drill 0.35)
  Top 0.152: v139.06,36.2 IC36.7
  Bottom 0.152: IC37.7 v139.06,36.2 140.34,37.47 140.34,48.9 IC35.15
N$110  (via drill 0.35)
  Top 0.152: IC36.8 v139.06,37.47 148.59,37.47 148.59,57.15 147.32,58.42 139.7,58.42 IC35.4
  Bottom 0.152: IC37.8 v139.06,37.47
N$111  (via drill 0.35)
  Top 0.152: IC35.16 147.96,57.15 147.96,43.81 143.51,39.37 v139.06,39.37 132.72,39.37 132.08,38.73 IC36.9
  Bottom 0.152: IC37.9 139.06,38.73 v139.06,39.37
N$112  (via drill 0.35)
  Top 0.152: v46.99,74.3 IC19.19 | IC8.6 23.5,28.57 v46.35,28.57 48.26,28.57 49.53,29.84 IC22.19
  Bottom 0.152: v46.99,74.3 46.35,73.66 46.35,56.52 IC13.11 46.35,52.7 v46.35,28.57
N$113  (via drill 0.35)
  Top 0.152: v57.78,28.57 IC22.1 | v57.15,71.75 57.78,71.75 59.05,73.03 IC19.1
  Bottom 0.152: IC10.6 58.42,26.67 | 58.42,26.67 58.42,27.94 v57.78,28.57 56.52,29.84 56.52,71.12 v57.15,71.75 | IC13.9 45.72,48.26 45.72,26.67 58.42,26.67
N$114  (via drill 0.35)
  Top 0.152: IC13.10 45.72,53.34 v76.2,53.34 | IC12.6 127.64,17.14 v78.74,17.14
  Bottom 0.152: 74.93,29.84 76.2,31.11 v76.2,53.34 76.2,73.03 74.93,74.3 IC20.19 | v78.74,17.14 76.83,17.14 76.83,27.94 74.93,29.84 | 74.93,29.84 IC23.19
N$115  (via drill 0.35)
  Top 0.152: IC13.8 38.1,50.8 v60.33,50.8
  Bottom 0.152: IC11.6 87.63,15.88 76.83,15.88 76.2,16.51 76.2,17.78 65.41,28.57 IC23.1 62.23,28.57 60.33,30.48 v60.33,50.8 60.33,68.58 64.77,73.03 IC20.1
N$117  (via drill 0.35)
  Top 0.152: v116.2,72.39 v91.44,72.39 89.53,72.39 88.9,73.03 IC26.1 | v84.45,28.57 IC29.1 | v80.64,21.59 77.47,18.41 57.78,18.41 IC10.7
  Bottom 0.152: v116.2,72.39 118.75,69.85 118.75,66.67 IC25.15 | v80.64,21.59 80.64,24.77 v84.45,28.57 84.45,33.02 90.81,39.37 90.81,52.7 91.44,53.34 v91.44,72.39
N$118  (via drill 0.35)
  Top 0.152: IC12.7 126.36,22.23 v107.31,22.23
  Bottom 0.152: 105.41,31.11 106.05,31.75 106.05,72.39 104.14,74.3 | 105.41,31.11 104.14,29.84 IC30.19 | v107.31,22.23 105.41,24.13 105.41,31.11 | IC25.16 115.57,68.58 115.57,74.3 104.14,74.3 | 104.14,74.3 IC27.19
N$119  (via drill 0.35)
  Top 0.152: IC25.14 113.03,58.42 v92.71,58.42
  Bottom 0.152: 92.71,28.57 85.72,28.57 85.72,20.95 IC11.7 | 92.71,28.57 IC30.1 | 92.71,28.57 v92.71,58.42 92.71,71.75 93.98,73.03 IC27.1
N$120  (via drill 0.35)
  Top 0.152: IC11.8 82.55,17.78 v104.14,17.78 | v135.25,50.8 110.49,50.8 IC25.8
  Bottom 0.152: 135.89,50.8 135.89,71.75 137.16,73.03 IC34.1 | 135.89,50.8 135.89,29.84 137.16,28.57 IC37.1 | v104.14,17.78 109.22,22.86 IC25.8 | v135.25,50.8 135.89,50.8
N$121  (via drill 0.35)
  Top 0.152: IC25.10 117.47,51.44 v119.38,51.44
  Bottom 0.152: 125.73,22.23 134.62,22.23 142.24,29.84 IC37.19 149.22,29.84 149.86,30.48 149.86,71.75 147.32,74.3 IC34.19 | IC12.8 125.73,22.23 | v119.38,51.44 121.28,49.53 121.28,26.67 125.73,22.23
N$122  (via drill 0.35)
  Top 0.152: v120.65,29.84 IC36.19 | v120.65,74.3 IC33.19
  Bottom 0.152: 118.75,31.75 v120.65,29.84 | 118.75,31.75 118.75,52.7 IC25.11 119.38,57.15 119.38,73.03 v120.65,74.3 | IC8.8 11.43,19.05 11.43,11.43 12.7,10.16 118.75,10.16 118.75,31.75
N$123  (via drill 0.35)
  Top 0.152: v118.11,29.21 130.81,29.21 131.44,28.57 IC36.1 | IC33.1 124.46,73.03 123.83,73.66 v114.94,73.66
  Bottom 0.152: 116.84,30.48 v118.11,29.21 | 116.84,30.48 IC25.9 114.94,51.44 v114.94,73.66 | IC10.8 54.61,19.05 54.61,11.43 55.24,10.79 116.84,10.79 116.84,30.48
STARTUP
  Top 0.152: IC35.9 137.16,48.26 124.46,48.26 IC31.9 121.92,48.26 93.98,48.26 | IC6.9 8.89,48.26 21.59,48.26 IC14.9 24.13,48.26 52.07,48.26 | 52.07,48.26 IC17.9 | 64.77,48.26 52.07,48.26 | IC21.9 64.77,48.26 | 78.74,48.26 IC24.9 | 64.77,48.26 78.74,48.26 | 93.98,48.26 IC28.9 | 78.74,48.26 93.98,48.26
VCC  (via drill 0.35)
  Top 0.152: 78.11,27.94 v73.03,27.94 50.8,27.94 50.16,28.57 IC22.20 | 78.11,27.94 78.74,28.57 IC29.20 | IC36.20 v102.23,28.57 90.17,28.57 89.53,27.94 78.11,27.94 | IC15.20 6.99,28.57 6.99,14.61 13.34,14.61 IC8.11 IC8.12 19.68,14.61 62.87,14.61 | IC12.12 IC12.11 128.91,14.61 85.72,14.61 | IC10.11 IC10.12 62.87,14.61 | IC11.12 IC11.11 85.72,14.61 | 85.72,14.61 62.87,14.61 | 140.34,68.58 144.78,68.58 IC35.20 | 140.34,68.58 132.08,68.58 IC31.20 129.54,68.58 115.57,68.58 111.76,64.77 | 120.65,71.75 80.64,71.75 79.38,73.03 IC26.20 | 120.65,71.75 121.92,73.03 IC33.20 | 140.34,68.58 140.34,71.75 120.65,71.75 | IC25.13 118.75,61.59 118.75,63.5 113.03,63.5 111.76,64.77 | 111.76,64.77 110.49,66.04 104.14,66.04 IC28.20 101.6,68.58 88.9,68.58 IC24.20 86.36,68.58 74.93,68.58 IC21.20 72.39,68.58 57.15,68.58 | v13.97,70.48 9.53,70.48 6.99,73.03 IC9.20 | IC6.20 16.51,66.04 24.13,66.04 25.4,67.31 IC14.20 31.75,68.58 57.15,68.58 | v57.15,70.48 52.7,70.48 50.16,73.03 IC19.20 45.09,73.03 v42.55,70.48 | IC17.20 57.15,68.58
  Bottom 0.152: IC23.20 73.03,28.57 v73.03,27.94 | 28.57,24.77 26.04,22.23 21.59,22.23 21.59,16.51 IC8.12 | 28.57,24.77 29.21,25.4 29.21,26.67 31.11,28.57 IC16.20 | IC12.12 139.7,19.05 139.7,21.59 146.69,28.57 IC37.20 | 102.87,27.94 100.97,26.04 100.97,25.4 97.79,22.23 91.44,22.23 91.44,13.97 IC11.12 | 102.87,27.94 103.5,28.57 IC30.20 | 102.87,27.94 v102.23,28.57 | IC35.20 146.05,72.39 146.69,73.03 IC34.20 | IC21.20 73.66,72.39 74.3,73.03 IC20.20 | IC25.13 IC25.12 | IC28.20 102.87,72.39 103.5,73.03 IC27.20 | 30.48,67.94 30.48,72.39 31.11,73.03 IC7.20 | v13.97,70.48 15.24,69.22 IC6.20 | IC13.12 IC13.13 42.55,61.59 v42.55,70.48 | v57.15,70.48 58.42,69.22 IC17.20 | 28.57,24.77 27.94,25.4 27.94,38.73 28.57,39.37 33.02,39.37 33.02,65.41 30.48,67.94 | 30.48,67.94 IC14.20